# Altium PCB PCB1.PcbDoc
Units mm, origin at the board's own origin, x right, y up, seen from the top; angles counter-clockwise.
Board outline 50 x 50 mm, 2 copper layers (Top Layer, Bottom Layer); 84 components, 71 nets, 262 pads, 0 vias.
Unrouted connection lines stored in the file: 160.
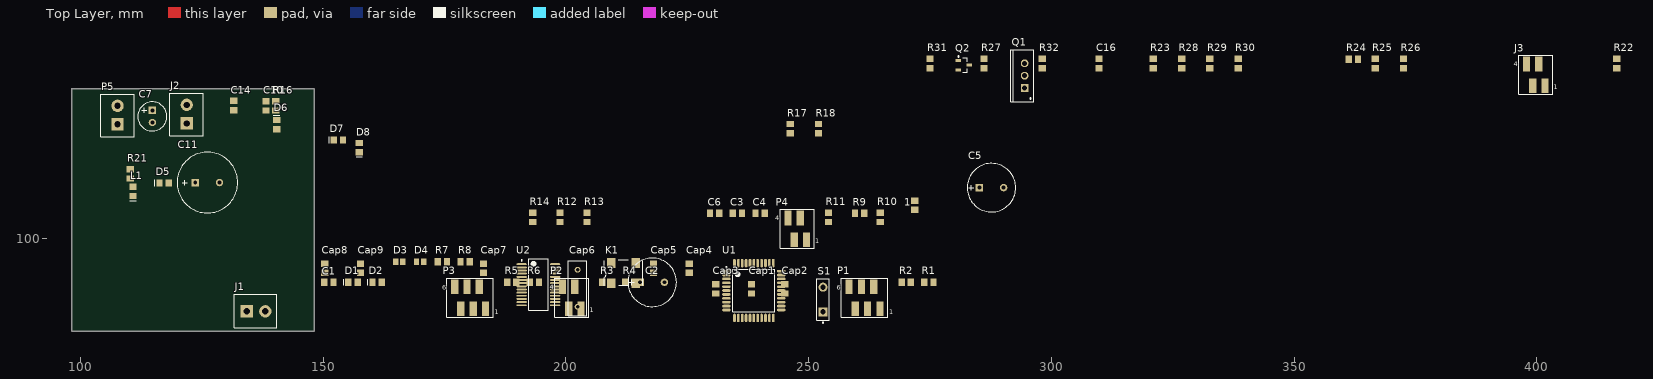
[diagram p0: Top Layer view]
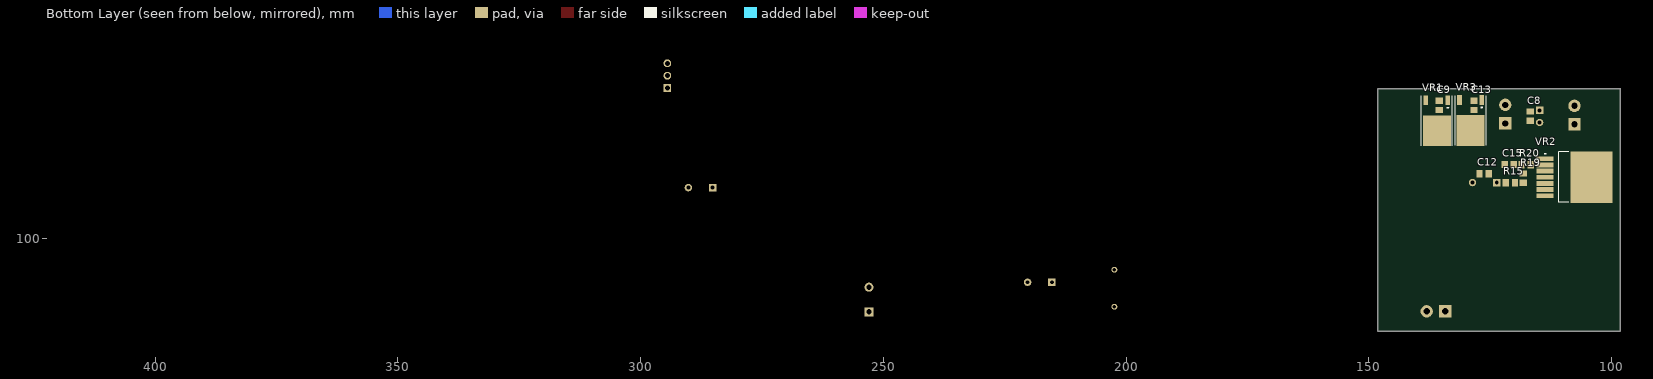
[diagram p1: Bottom Layer view, seen from below]

## Layer stack, top to bottom
Top Solder: solder mask 0.0102, Solder Resist, Dk 3.5
Top Layer: signal copper 0.0356
Dielectric1: dielectric 0.32, FR-4, Dk 4.8
Bottom Layer: signal copper 0.0356
Bottom Solder: solder mask 0.0102, Solder Resist, Dk 3.5

## Board outline
98.175,80.875 98.175,130.875 148.175,130.875 148.175,80.875

## Design rules (kind name [scope] priority, off if disabled: settings)
Clearance [All] p1: gap=0.254
PolygonConnect [All] p1: connectstyle=Relief reliefconductorwidth=0.254 reliefentries=4 polygonreliefangle="90 Angle" airgapwidth=0.254
RoomDefinition "Sheet 4 - Capteurs" [InComponentClass('Sheet 4 - Capteurs')] p1: confinementstyle=ConfineIn formatcopy=TRUE lockcomponents=FALSE outline 149.307,126.681 426.171,126.681 426.171,140.407 149.307,140.407
RoomDefinition "Sheet 3 - Alims" [InComponentClass('Sheet 3 - Alims')] p2: confinementstyle=ConfineIn formatcopy=TRUE lockcomponents=FALSE outline 149.307,107.43 324.591,107.43 324.591,126.981 149.307,126.981
RoomDefinition "Sheet 2 - Moteurs" [InComponentClass('Sheet 2 - Moteurs')] p3: confinementstyle=ConfineIn formatcopy=TRUE lockcomponents=FALSE outline 149.307,95.755 272.863,95.755 272.863,108.705 149.307,108.705
RoomDefinition "Sheet 1 - Micro" [InComponentClass('Sheet 1 - Micro')] p4: confinementstyle=ConfineIn formatcopy=TRUE lockcomponents=FALSE outline 149.307,82.254 276.638,82.254 276.638,94.48 149.307,94.48
RoutingVias [All] p1: holewidth=0.711 width=1.27 viastyle="Through Hole" minholewidth=0.711 minwidth=1.27 maxholewidth=0.711 maxwidth=1.27
SilkToSolderMaskClearance SilkscreenOverComponentPads [IsPad] p1: minsilkscreentomaskgap=0.254 clearancetoexposedcopper=TRUE
SolderMaskExpansion [All] p1: expansion=0.102
UnpouredPolygon [All] p1: allowunpoured=FALSE
Width [All] p1: maxlimit=0.254 minlimit=0.254 preferedwidth=0.254
28 further rules are at their usual default settings.

## Classes and differential pairs
component class "Sheet 1 - Micro": C2 Cap1 Cap2 Cap3 Cap4 Cap5 Cap6 Cap7 Cap8 Cap9 D1 D2 D3 D4 K1 P1 P2 P3 R1 R2 R3 R4 R5 R6 R7 R8 S1 U1 U2
component class "Sheet 2 - Moteurs": 1 C4 C5 C6 IC1 J1 P4 R9 R10 R11 R12 R13 R14 U2
component class "Sheet 3 - Alims": C5 C11 C12 C13 C14 C15 D5 D6 D7 D8 J2 L1 P5 R14 R15 VR1 VR2 VR3
component class "Sheet 4 - Capteurs": C12 J3 Q1 Q2 R15 R23 R24 R25 R26 R27 R29 R31 R32

## Components (designator, comment, footprint, x,y, rotation, side; value= is the part's Value field where it differs from the comment)
1 "Cap2" 0805 271.863,106.83 r90 top
C1 "Cap" 0805 151.157,90.954 r0 top
C2 "Cap2" CAPA_D10_E5 217.786,90.954 r0 top
C3 "Cap" 0805 235.311,105.155 r0 top
C4 "Cap" 0805 239.987,105.155 r0 top
C5 "Cap2" CAPA_D10_E5 287.675,110.45 r0 top
C6 "Cap" 0805 230.636,105.155 r0 top
C7 "Cap2" CAPA_D6_E2.5 114.8,125.125 r270 top
C8 "Cap" 0805 116.75,125.175 r90 bottom
C9 "Cap" 0805 135.45,127.4 r90 bottom
C10 "Cap" 0805 138.2,127.3 r90 top
C11 "Cap2" CAPA_D12.5_E5 126.125,111.5 r0 top
C12 "Cap" 0805 126.25,113.325 r180 bottom
C13 "Cap" 0805 128.325,127.4 r90 bottom
C14 "Cap" 0805 131.55,127.375 r90 top
C15 "Cap" 0805 121.05,115.225 r180 bottom
C16 "Cap" 0805 309.815,136.032 r90 top
Cap1 "0.1uF" 0805 238.237,89.604 r90 top
Cap2 "0.1uF" 0805 245.087,89.604 r90 top
Cap3 "0.1uF" 0805 230.861,89.604 r90 top
Cap4 "0.1uF" 0805 225.386,93.855 r90 top
Cap5 "0.1uF" 0805 218.036,93.855 r90 top
Cap6 "Cap" RAD-0.3 202.41,89.729 r90 top
Cap7 "0.1uF" 0805 183.009,93.855 r90 top
Cap8 "0.1uF" 0805 150.307,93.855 r90 top
Cap9 "0.1uF" 0805 157.683,93.855 r90 top
D1 "LED2" C0805#1 156.133,90.954 r0 top
D2 "LED2" C0805#1 161.108,90.954 r0 top
D3 "LED2" C0805#2 165.658,95.205 r0 top
D4 "LED2" C0805#2 169.958,95.205 r0 top
D5 "D Schottky" C0805#1 117.225,111.425 r0 top
D6 "LED2" C0805#1 140.4,123.425 r270 top
D7 "LED2" C0805#1 153.1,120.25 r0 top
D8 "LED2" C0805#1 157.425,118.7 r90 top
J1 "Moteur" MINICONNEC_D 131.65,81.575 r90 top
J2 "12V" MINICONNEC_D 125.275,121.1 r180 top
J3 "CO" 690367280476 399.795,133.682 r0 top
K1 "CLOCK" IQXO-70 209.31,94.93 r0 top
L1 "Inductor" C0805#1 110.825,109.7 r90 top
P1 "Pick-it" 690367280676 261.513,87.754 r0 top
P2 "I²C" 690367280476 201.185,87.754 r0 top
P3 "Uart bluetooth" 690367280676 180.259,87.754 r0 top
P4 "Codeur" 690367280476 247.662,101.955 r0 top
P5 "5V" MINICONNEC_D 111.025,120.9 r180 top
Q1 "PMOS-2" SFM-T3/A4.7V 294.5,133.525 r90 top
Q2 "QNPN" SOT95P240-3N 281.989,135.682 r0 top
R1 "Res3" 0805 274.788,90.954 r0 top
R2 "" 0805 270.113,90.954 r0 top
R3 "Res3" 0805 208.46,90.954 r0 top
R4 "Res3" 0805 213.135,90.954 r0 top
R5 "330" 0805 188.834,90.954 r0 top
R6 "Res3" 0805 193.509,90.954 r0 top
R7 "Res3" 0805 174.534,95.205 r0 top
R8 "Res3" 0805 179.209,95.205 r0 top
R9 "Res3" 0805 260.513,105.155 r0 top
R10 "Res3" 0805 264.763,104.33 r90 top
R11 "Res3" 0805 254.087,104.33 r90 top
R12 "Res3" 0805 198.785,104.33 r90 top
R13 "Res3" 0805 204.36,104.33 r90 top
R14 "Res3" 0805 193.184,104.33 r90 top
R15 "Res3" 0805 120.825,111.475 r0 bottom
R16 "Res3" 0805 140.2,127.3 r90 top
R17 "Res3" 0805 246.187,122.606 r90 top
R18 "Res3" 0805 252.037,122.606 r90 top
R19 "Res3" 0805 118.15,112.425 r270 bottom
R20 "Res3" 0805 117.575,115.2 r180 bottom
R21 "Res3" 0805 110.225,113.3 r90 top
R22 "Res3" 0805 416.47,136.032 r90 top
R23 "Res3" 0805 320.991,136.032 r90 top
R24 "Res3" 0805 362.243,136.882 r0 top
R25 "Res3" 0805 366.743,136.032 r90 top
R26 "Res3" 0805 372.568,136.032 r90 top
R27 "Res3" 0805 286.114,136.032 r90 top
R28 "Res3" 0805 326.841,136.032 r90 top
R29 "Res3" 0805 332.666,136.032 r90 top
R30 "Res3" 0805 338.517,136.032 r90 top
R31 "Res3" 0805 274.988,136.032 r90 top
R32 "Res3" 0805 298.115,136.032 r90 top
S1 "SW-PB" SPST-2 252.962,87.404 r90 top
U1 "DSPIC33FJ128MC804T-I/PT" TQFP-PT44_N 238.712,89.254 r0 top
U2 "IC_FT232RL" SSOP-28 194.334,90.454 r0 top
VR1 "LM1117T-3.3" KTP02 135.975,125.325 r0 bottom
VR2 "LM2588" TS7B_M 107.6,112.6 r180 bottom
VR3 "LM1117T-5.0" KTP02 129.025,125.375 r0 bottom

## Footprints (in the part's own frame and the unit in brackets; to place one, negate y for a bottom-side part, rotate by r counter-clockwise, add the part's x,y. Pads: shape width x height; smd on the part's side, far side on the other; paste and mask are expansions set on the pad)
0805 [mm] "Chip Resistor; Body 2.0 x 1.3 mm (LxW typ)"
  rect 1.3x1.5 smd: 1(-0.95,0) 2(0.95,0)
690367280476 [mm] "without Latch, 4 pins, SMT, straight"
  rect 1.5x3 smd: 1(1.905,-2.25) 2(0.635,2.25) 3(-0.635,-2.25) 4(-1.905,2.25)
  silkscreen extent -3.54,-4 3.54,4, body extent -3.54,-5 3.54,3.5, height 5.7
690367280676 [mm] "without Latch, 6 pins, SMT, straight"
  rect 1.5x3 smd: 1(3.175,-2.25) 2(1.905,2.25) 3(0.635,-2.25) 4(-0.635,2.25) 5(-1.905,-2.25) 6(-3.175,2.25)
  silkscreen extent -4.81,-4 4.81,4, body extent -4.81,-5 4.81,3.5, height 5.75
C0805#1 [mm] "Chip Capacitor; Body 2.0 x 1.2 mm (LxW typ)"
  rect 1.3x1.5 smd: 1(-0.95,0) 2(0.95,0)
  silkscreen extent -1.9,-0.65 -1.9,0.65
C0805#2 [mm] "Chip Capacitor, Body 2.0x1.3mm, IPC High Density"
  rect 1.1x1.4 smd: 1(-0.75,0) 2(0.75,0)
  body extent -1.1,-0.72 1.1,0.72, height 1.4
CAPA_D6_E2.5 [mm]
  rect 1.524x1.524 hole 0.8: 1(-1.25,0)
  round 1.524 hole 0.8: 2(1.25,0)
  silkscreen extent -3,-3 3,3
CAPA_D10_E5 [mm]
  rect 1.524x1.524 hole 0.8: 1(-2.5,0)
  round 1.524 hole 0.8: 2(2.5,0)
  silkscreen extent -5,-5 5,5
CAPA_D12.5_E5 [mm]
  rect 1.524x1.524 hole 0.8: 1(-2.5,0)
  round 1.524 hole 0.8: 2(2.5,0)
  silkscreen extent -6.25,-6.25 6.25,6.25
IQXO-70 [mil]
  rect 70x79 smd: 1(0,-165) 2(200,-165) 3(200,0) 4(0,0)
  silkscreen extent -55,-182 255,25
KTP02 [mm] "PowerFLEX (D-PAK/TO-252-AA); 3 Leads (1 Cropped); Body 9.7 (inc. leads) x 6.2 mm (LxW max)"
  rect 0.95x2 smd: 1(-2.285,-3.15) 3(2.285,-3.15)
  rect 5.8x6.3 smd: 4(0,3.15)
  silkscreen extent -3.2,-4.05 3.2,6.2
MINICONNEC_D [mm]
  rect 2.54x2.54 hole 1.27: 1(3.4,-2.6)
  round 2.54 hole 1.27: 2(3.4,-6.41)
  silkscreen extent 0,-8.76 6.9,0
RAD-0.3 [mm] "Radial Cap, Thru-Hole; 2 Leads; 0.3 in Pin Spacing"
  round 1.2 hole 0.7: 1(-3.81,0) 2(3.81,0)
  silkscreen extent -5.71,-1.91 5.71,1.91
SFM-T3/A4.7V [mm] "TO, Thru-Hole, Vertical, Heatsink Mounted; 3 In-Line Leads; Pitch 2.54 mm"
  rect 1.6x1.6 hole 1: 1(-2.54,0)
  round 1.6 hole 1: 2(0,0) 3(2.54,0)
  silkscreen extent -5.35,-1.85 5.35,2.85, body extent -5.4,-1.9 5.4,2.9, height 19.3
SOT95P240-3N [mm] "SOT23, 3-Leads, Body 2.9x1.3mm, Pitch 0.95mm, Lead Span 2.4mm, IPC Medium Density"
  rect 1.15x0.6 smd: 1(-1.125,0.95) 2(-1.125,-0.95) 3(1.125,0)
  silkscreen extent -1.25,-1.5 0.7,1.92, body extent -0.7,-1.5 0.7,1.5, height 1.14
SPST-2 [mm] "Circuit Breaker; 2 Leads"
  rect 1.85x1.85 hole 1.1: 1(-2.54,0)
  round 1.85 hole 1.1: 2(2.54,0)
  silkscreen extent -4.89,-1.27 4.28,1.27
SSOP-28 [mm] "28-Pin SSOP 0.65 mm Pitch"
  oval 2.1x0.4 smd: 1(-3.45,4.225) 2(-3.45,3.575) 3(-3.45,2.925) 4(-3.45,2.275) 5(-3.45,1.625) 6(-3.45,0.975) 7(-3.45,0.325) 8(-3.45,-0.325) 9(-3.45,-0.975) 10(-3.45,-1.625) 11(-3.45,-2.275) 12(-3.45,-2.925) 13(-3.45,-3.575) 14(-3.45,-4.225) 15(3.45,-4.225) 16(3.45,-3.575) 17(3.45,-2.925) 18(3.45,-2.275) 19(3.45,-1.625) 20(3.45,-0.975) 21(3.45,-0.325) 22(3.45,0.325) 23(3.45,0.975) 24(3.45,1.625) 25(3.45,2.275) 26(3.45,2.925) 27(3.45,3.575) 28(3.45,4.225)
  silkscreen extent -3.57,-5.3 2,5.3, body extent -2.7,-5.3 2.7,5.3, height 2
TQFP-PT44_N [mm] "Thin QFP, 44-Leads, Body 10x10mm, Pitch 0.8mm, IPC Medium Density"
  oval 1.75x0.55 smd: 1(-5.65,4) 2(-5.65,3.2) 3(-5.65,2.4) 4(-5.65,1.6) 5(-5.65,0.8) 6(-5.65,0) 7(-5.65,-0.8) 8(-5.65,-1.6) 9(-5.65,-2.4) 10(-5.65,-3.2) 11(-5.65,-4) 23(5.65,-4) 24(5.65,-3.2) 25(5.65,-2.4) 26(5.65,-1.6) 27(5.65,-0.8) 28(5.65,0) 29(5.65,0.8) 30(5.65,1.6) 31(5.65,2.4) 32(5.65,3.2) 33(5.65,4)
  oval 0.55x1.75 smd: 12(-4,-5.65) 13(-3.2,-5.65) 14(-2.4,-5.65) 15(-1.6,-5.65) 16(-0.8,-5.65) 17(0,-5.65) 18(0.8,-5.65) 19(1.6,-5.65) 20(2.4,-5.65) 21(3.2,-5.65) 22(4,-5.65) 34(4,5.65) 35(3.2,5.65) 36(2.4,5.65) 37(1.6,5.65) 38(0.8,5.65) 39(0,5.65) 40(-0.8,5.65) 41(-1.6,5.65) 42(-2.4,5.65) 43(-3.2,5.65) 44(-4,5.65)
  silkscreen extent -5.77,-4.35 4.35,4.95, body extent -5,-5 5,5, height 1.2
TS7B_M [mm] "D2-PAK, 8-Leads, Body 8.6x10.2mm, Pitch 1.27mm, Lead Span 14.1mm, IPC Low Density"
  rect 3.5x1 smd: 1(-6.05,3.81) 2(-6.05,2.54) 3(-6.05,1.27) 4(-6.05,0) 5(-6.05,-1.27) 6(-6.05,-2.54) 7(-6.05,-3.81)
  rect 8.6x10.55 smd: 8(3.5,0)
  silkscreen extent -6.18,-5.2 -1.2,5.2, body extent -3.3,-5.2 6.1,5.2, height 4.64

## Part data
1 Cap1 Cap2 Cap3 Cap4 Cap5 Cap7 Cap8 Cap9: library part Cap, "Capacitor"
C1 C2 C3 C4 C5 C6 C7 C8 C9 C10 C11 C12 C13 C14 C15 C16 Cap6: "Capacitor"
D1 D2 D3 D4 D6 D7 D8: "Typical RED, GREEN, YELLOW, AMBER GaAs LED"
D5: "Schottky Diode"
J1 J2: library part MINICONNEC_2B, "Connecteur"
J3: library part "MICRO-MATCH FOB.04P", "Connecteur"
K1: library part OSCILLATEUR, "Oscillateur quartz"
P1 P3: library part MHDR1X6, "Header, 6-Pin"
P2 P4: library part MHDR1X4, "Header, 4-Pin"
P5: library part MHDR1X2, "Header, 2-Pin"
Q1: "P-Channel Power MOSFET"
Q2: "NPN Bipolar Transistor"
R1 R3 R4 R6 R7 R8 R9 R10 R11 R12 R13 R14 R15 R16 R17 R18 R19 R20 R21 R22 R23 R24 R25 R26 R27 R28 R29 R30 R31 R32: "Resistor"
R2 R5: library part Res3, "Resistor"
S1: "Switch"
U1: "High-Performance 16-bit Digital Signal Controller, 128 KB Flash, 16 KB RAM, 44-Pin TQFP, Industrial Temperature, Tape and Reel"
U2: "FT232R USB UART"
VR1 VR3: library part "Volt Reg", "Voltage Regulator"

## Nets (pads, with @x,y where several pads share a name; then routed paths per layer and width w, separated by ;. In a path a pad name is that pad's centre, name@x,y a point inside that pad or via, vN(x,y) a via of type N, cw(c..) or ccw(c..) an arc to the next point about the centre after c; other vN are vias at no path point)
"3.3 V": R1.2
3.3V: C1.2 C10.2 Cap1.2 Cap2.2 P1.2 P2.3 P3.4 R3.2 R4.2 R16.2 R22.1 U1.17 U1.28 U1.40 VR1.3
5V: 1.2 C2.1 C14.2 Cap6.1 Cap8.1 Cap9.1 K1.1 K1.4 P4.3 R17.2 U2.4 U2.20 VR3.3
12V: C5.1 C6.2 C9.2 C11.1 C12.2 C13.2 J2.2 Q1.3 R15.2 R18.2 R23.2 VR1.1 VR3.1
"EN CAPTEUR": J3.4 Q1.2
GND: 1.1 C1.1 C2.2 C5.2 C6.1 C7.2 C8.1 C9.1 C10.1 C11.2 C12.1 C13.1 C14.1 C15.1 C16.2 Cap1.1 Cap2.1 Cap3.1 Cap4.1 Cap6.2 Cap7.2 Cap8.2 Cap9.2 D1.2 D2.2 D3.2 D4.2 D6.2 D7.2 D8.2 J2.1 J3.1 J3.3 K1.2 P1.3 P2.1 P3.6 P4.2 P5.1 Q2.3 R11.2 R14.2 R21.1 R31.1 R32.1 S1.1 U1.6 U1.16 U1.29 U1.39 U2.7 U2.18 U2.21 U2.25 U2.26 VR2.4
NC: U2.8 U2.24
NetC3_1: C3.1
NetC3_2: C3.2 J1.1
NetC4_1: C4.1
NetC4_2: C4.2 J1.2
NetC7_1: C7.1 C8.2 L1.1 P5.2 VR2.7
NetC15_2: C15.2 R20.1
NetC16_1: C16.1 R24.2 R28.2
NetCap5_2: Cap3.2 R1.1 R2.1 S1.2
NetCap7_1: Cap7.1 U2.17
NetD1_1: D1.1 R5.2
NetD2_1: D2.1 R6.2
NetD3_1: D3.1 R7.2
NetD4_1: D4.1 R8.2
NetD5_1: D5.1 L1.2 VR2.5
NetD5_2: D5.2 R15.1 R19.2
NetD6_1: D6.1 R16.1
NetD7_1: D7.1 R17.1
NetD8_1: D8.1 R18.1
NetJ3_2: J3.2 R26.2 R30.1
NetK1_3: K1.3 U1.30
NetP1_1: P1.1 R2.2 U1.18
NetP1_4: P1.4 U1.21
NetP1_5: P1.5 U1.22
NetP2_2: P2.2 R3.1 U1.1
NetP2_4: P2.4 R4.1 U1.44
NetP3_1: P3.1 U1.32
NetP3_2: P3.2 U1.15
NetP3_3: P3.3 U1.14
NetP3_5: P3.5 U1.13
NetP4_1: P4.1 R13.2
NetP4_4: P4.4 R10.2
NetQ1_1: Q1.1 Q2.1 R23.1
NetQ2_2: Q2.2 R27.1 R31.2
NetR5_1: R5.1
NetR6_1: R6.1
NetR7_1: R7.1 U2.23
NetR8_1: R8.1 U2.22
NetR9_1: R9.1 U1.4
NetR9_2: R9.2 R10.1 R11.1
NetR12_1: R12.1 U1.5
NetR12_2: R12.2 R13.1 R14.1
NetR19_1: R19.1 R21.2 VR2.3
NetR20_2: R20.2 VR2.2
NetR22_2: R22.2 R24.1 R25.1
NetR25_2: R25.2 R26.1
NetR27_2: R27.2
NetR28_1: R28.1 R29.2 R32.2
NetR29_1: R29.1 R30.2
NetU1_2: U1.2
NetU1_3: U1.3
NetU1_8: U1.8
NetU1_9: U1.9
NetU1_10: U1.10 U2.1
NetU1_11: U1.11 U2.5
NetU1_23: U1.23
NetU1_24: U1.24
NetU1_25: U1.25
NetU1_26: U1.26
NetU1_34: U1.34
NetU1_35: U1.35
NetU1_43: U1.43
NetU2_15: U2.15
NetU2_16: U2.16
VCAP: Cap4.2 U1.7
pads on no net: Cap5.1 Cap5.2 P1.6 U1.12 U1.19 U1.20 U1.27 U1.31 U1.33 U1.36 U1.37 U1.38 U1.41 U1.42 U2.2 U2.3 U2.6 U2.9 U2.10 U2.11 U2.12 U2.13 U2.14 U2.19 U2.27 U2.28 VR1.4 VR2.1 VR2.6 VR2.8 VR3.4

## Text inside footprints (layer, text, board x,y; h text height)
J3: Top Overlay "1" at 403.545,130.682 h1; Top Overlay "4" at 395.295,135.432 h1
P1: Top Overlay "1" at 266.593,84.325 h1; Top Overlay "6" at 255.798,89.405 h1
P2: Top Overlay "1" at 204.935,84.754 h1; Top Overlay "4" at 196.685,89.504 h1
P3: Top Overlay "1" at 185.339,84.325 h1; Top Overlay "6" at 174.544,89.405 h1
P4: Top Overlay "1" at 251.412,98.955 h1; Top Overlay "4" at 243.162,103.705 h1